# Altium PCB CT_Breakout_Board.PcbDoc
Units mm, origin at the board's own origin, x right, y up, seen from the top; angles counter-clockwise.
Board outline 45.97 x 72.39 mm, 2 copper layers (Top Layer, Bottom Layer); 51 components, 20 nets, 112 pads, 13 vias.
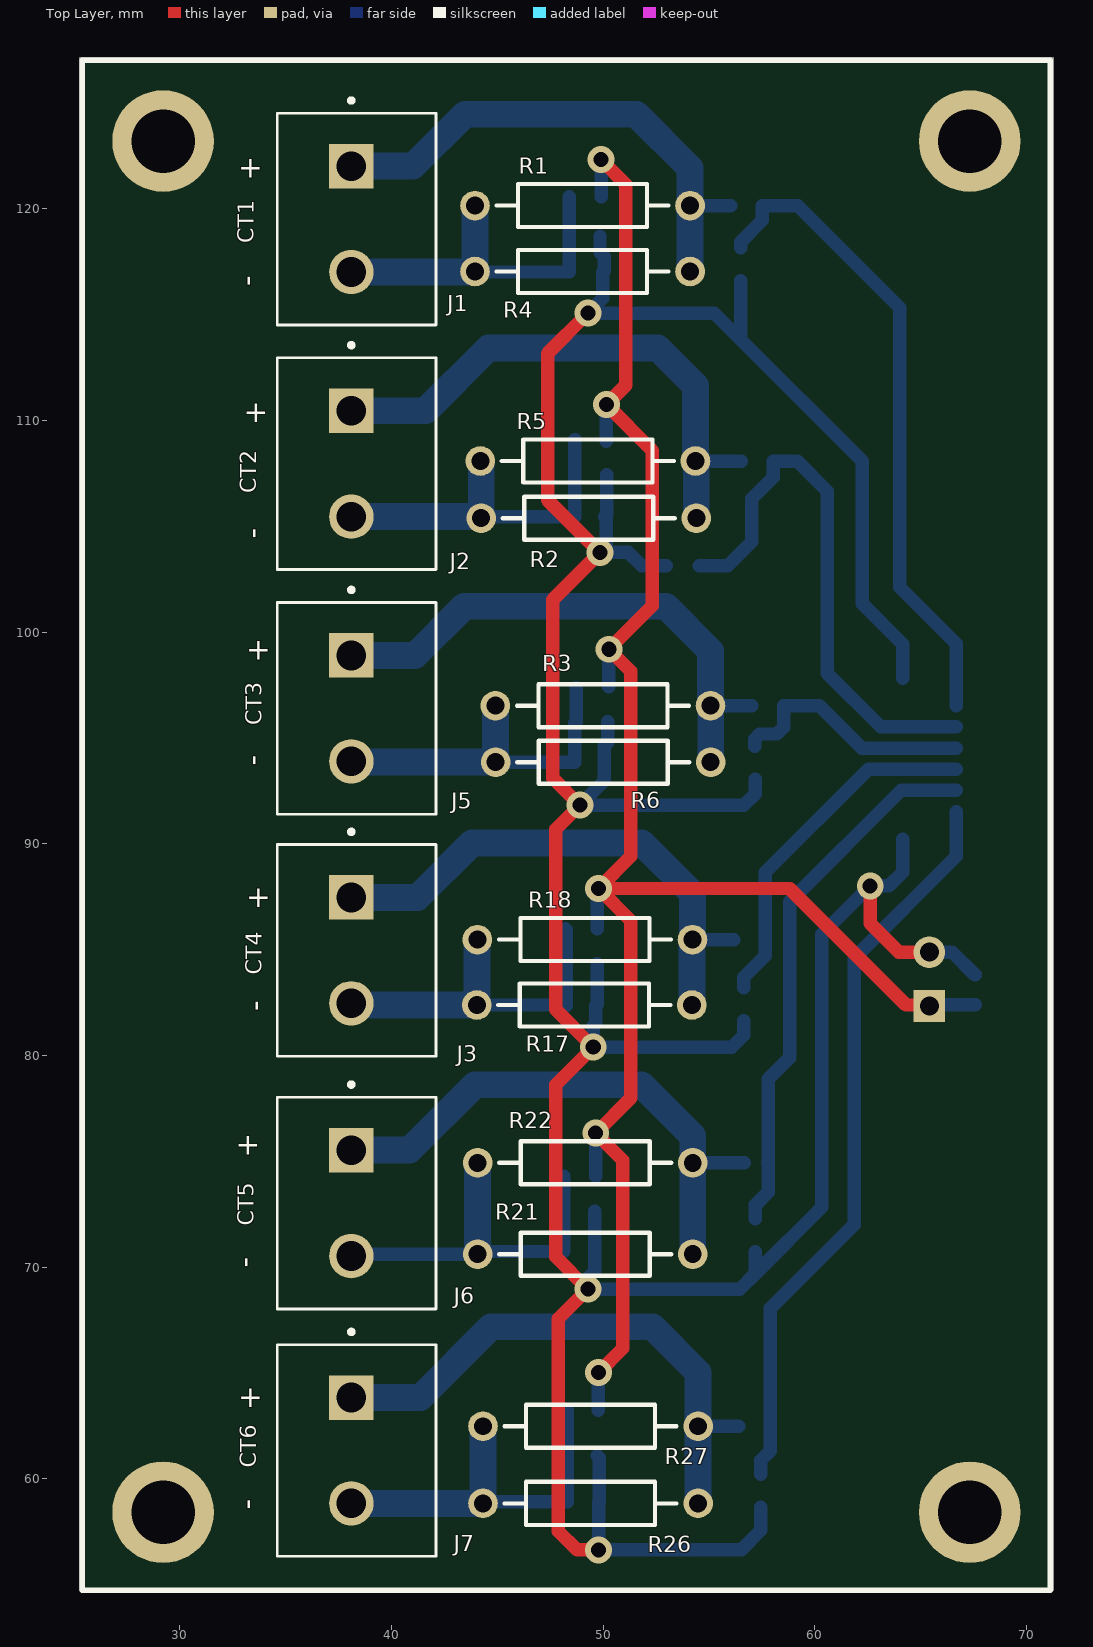
[diagram p0: Top Layer view]
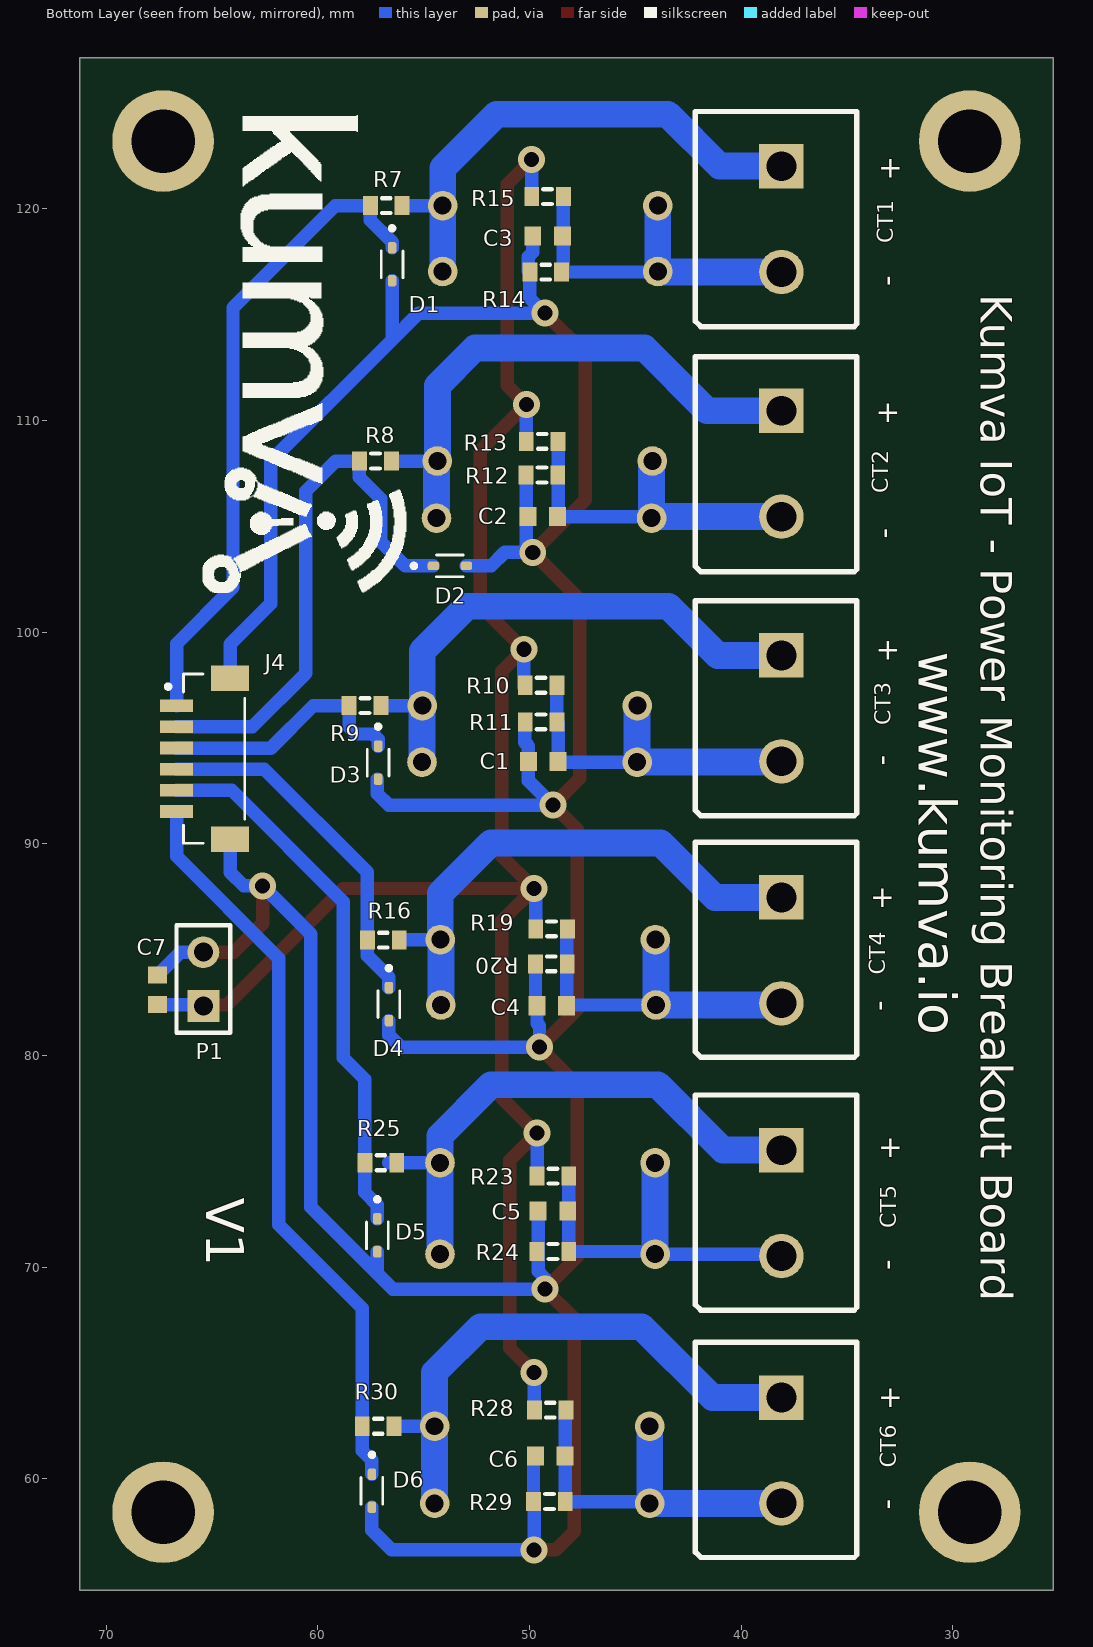
[diagram p1: Bottom Layer view, seen from below]

## Layer stack, top to bottom
Top Solder: solder mask 0.0102, Solder Resist, Dk 3.5
Top Layer: signal copper 0.0356
Dielectric 1: dielectric 0.32, FR-4, Dk 4.8
Bottom Layer: signal copper 0.0356
Bottom Solder: solder mask 0.0102, Solder Resist, Dk 3.5

## Board outline
25.273,54.737 71.247,54.737 71.247,127.127 25.273,127.127

## Design rules (kind name [scope] priority, off if disabled: settings)
Clearance [All] p1: gap=0.254 ignorepadtopadclearanceinfootprint=FALSE except(0: Arc-Hole Track-Hole SMDPad-Hole THPad-Hole Via-Hole Fill-Hole Poly-Hole Region-Hole Text-Hole)
HoleSize [All] p1: absolutevalues=TRUE maxlimit=5 minlimit=0.025 maxpercent=80.000 minpercent=20.000
MinimumSolderMaskSliver [All] p1: minsoldermaskwidth=0.127
PolygonConnect [All] p1: connectstyle=Relief reliefconductorwidth=0.254 reliefentries=4 polygonreliefangle="90 Angle" airgapwidth=0.254
RoutingVias [All] p1: holewidth=0.711 width=1.27 viastyle="Through Hole" minholewidth=0.711 minwidth=1.27 maxholewidth=0.711 maxwidth=1.27
SilkToSilkClearance [All] p1: silktosilkclearance=0.076
SilkToSolderMaskClearance [IsPad] p1: minsilkscreentomaskgap=0.076 clearancetoexposedcopper=TRUE
SolderMaskExpansion [All] p1: expansion=0.102
Width [All] p1: maxlimit=1.524 minlimit=0.254 preferedwidth=0.635 minimp=50.000000 maximp=50.000000 favimp=50.000000
26 further rules are at their usual default settings.

## Components (designator, comment, footprint, x,y, rotation, side; value= is the part's Value field where it differs from the comment)
C1 "Cap Semi" 1608[0603] 49.352,93.893 r180 bottom value=10uF/6V
C2 "Cap Semi" 1608[0603] 49.37,105.45 r180 bottom value=10uF/6V
C3 "Cap Semi" 1608[0603] 49.149,118.699 r180 bottom value=10uF/6V
C4 "Cap Semi" 1608[0603] 48.948,82.346 r180 bottom value=10uF/6V
C5 "Cap Semi" 1608[0603] 48.895,72.644 r180 bottom value=10uF/6V
C6 "Cap Semi" 1608[0603] 49.022,61.087 r180 bottom value=10uF/6V
C7 "Cap Semi" 1608[0603] 67.564,83.101 r270 bottom value=0.1uF
D1 "BZT52C3V3T-7" SODFL1608X65N 56.493,117.372 r270 bottom
D2 "BZT52C3V3T-7" SODFL1608X65N 53.761,103.124 r180 bottom
D3 "BZT52C3V3T-7" SODFL1608X65N 57.15,93.831 r270 bottom
D4 "BZT52C3V3T-7" SODFL1608X65N 56.642,82.423 r270 bottom
D5 "BZT52C3V3T-7" SODFL1608X65N 57.19,71.501 r270 bottom
D6 "BZT52C3V3T-7" SODFL1608X65N 57.444,59.436 r270 bottom
J1 "CON22" HANDSON_KF301-2P 38.1,119.507 r270 top
J2 "CON22" HANDSON_KF301-2P 38.1,107.95 r270 top
J3 "CON22" HANDSON_KF301-2P 38.1,84.963 r270 top
J4 "BM06B-SRSS-TB(LF)(SN)" JST_BM06B-SRSS-TB(LF)(SN) 64.897,94.02 r270 bottom
J5 "CON22" HANDSON_KF301-2P 38.1,96.393 r270 top
J6 "CON22" HANDSON_KF301-2P 38.1,73.025 r270 top
J7 "CON22" HANDSON_KF301-2P 38.1,61.341 r270 top
P1 "Power" HDR1X2 65.405,82.336 r90 bottom
R1 "DNC" AXIAL-0.4 49.022,120.142 r0 top value=22
R2 "DNC" AXIAL-0.4 49.316,105.377 r0 top value=22
R3 "DNC" AXIAL-0.4 49.986,96.52 r0 top value=22
R4 "22" AXIAL-0.4 49.022,117.029 r0 top
R5 "22" AXIAL-0.4 49.276,108.077 r0 top
R6 "22" AXIAL-0.4 49.998,93.853 r0 top
R7 "Res3" J1-0603 56.769,120.142 r0 bottom value=1K
R8 "Res3" J1-0603 57.277,108.077 r0 bottom value=1K
R9 "Res3" J1-0603 57.773,96.52 r0 bottom value=1K
R10 "Res3" J1-0603 49.456,97.485 r0 bottom value=470K
R11 "Res3" J1-0603 49.455,95.758 r180 bottom value=470K
R12 "Res3" J1-0603 49.415,107.419 r180 bottom value=470K
R13 "Res3" J1-0603 49.403,109.006 r0 bottom value=470K
R14 "Res3" J1-0603 49.236,117.001 r180 bottom value=470K
R15 "Res3" J1-0603 49.149,120.569 r0 bottom value=470K
R16 "Res3" J1-0603 56.908,85.449 r0 bottom value=1K
R17 "DNC" AXIAL-0.4 49.109,82.383 r0 top value=22
R18 "22" AXIAL-0.4 49.137,85.471 r0 top
R19 "Res3" J1-0603 48.96,85.979 r0 bottom value=470K
R20 "Res3" J1-0603 48.97,84.328 r180 bottom value=470K
R21 "DNC" AXIAL-0.4 49.149,70.612 r0 top value=22
R22 "22" AXIAL-0.4 49.149,74.93 r0 top
R23 "Res3" J1-0603 48.895,74.295 r0 bottom value=470K
R24 "Res3" J1-0603 48.895,70.739 r180 bottom value=470K
R25 "Res3" J1-0603 57.023,74.93 r0 bottom value=1K
R26 "DNC" AXIAL-0.4 49.403,58.841 r0 top value=22
R27 "22" AXIAL-0.4 49.403,62.484 r0 top
R28 "Res3" J1-0603 49.022,63.246 r0 bottom value=470K
R29 "Res3" J1-0603 49.062,58.928 r180 bottom value=470K
R30 "Res3" J1-0603 57.15,62.484 r0 bottom value=1K

## Footprints (in the part's own frame and the unit in brackets; to place one, negate y for a bottom-side part, rotate by r counter-clockwise, add the part's x,y. Pads: shape width x height; smd on the part's side, far side on the other; paste and mask are expansions set on the pad)
1608[0603] [mm] "Chip Capacitor, Body 1.6x0.8mm, IPC High Density"
  rect 0.8x0.9 smd: 1(-0.7,0) 2(0.7,0)
  body extent -0.87,-0.48 0.87,0.48, height 1.3
AXIAL-0.4 [mm] "Axial Device, Thru-Hole; 2 Leads; 0.4 in Pin Spacing"
  round 1.4 hole 0.85: 1(-5.08,0) 2(5.08,0)
  silkscreen extent -4.06,-1.02 4.06,1.02
HANDSON_KF301-2P [mm]
  rect 2.1x2.1 hole 1.4: 1(-2.5,0)
  round 2.1 hole 1.4: 2(2.5,0)
  silkscreen extent -5.7,-3.5 5,4
HDR1X2 [mm] "Connector; Header; 2 Position"
  rect 1.5x1.5 hole 0.9: 1(0,0)
  round 1.5 hole 0.9: 2(2.54,0)
  silkscreen extent -1.27,-1.27 3.81,1.27
J1-0603 [mm] "Chip Resistor, Body 1.6x0.8mm, IPC High Density"
  rect 0.7x0.9 smd: 1(-0.75,0) 2(0.75,0)
  silkscreen extent -0.2,-0.35 0.2,0.35, body extent -0.85,-0.48 0.85,0.48, height 0.9
JST_BM06B-SRSS-TB(LF)(SN) [mm]
  rect 0.6x1.55 smd: 1(-2.5,-1.775) 2(-1.5,-1.775) 3(-0.5,-1.775) 4(0.5,-1.775) 5(1.5,-1.775) 6(2.5,-1.775)
  rect 1.2x1.8 smd: S1(-3.8,0.75) S2(3.8,0.75)
  silkscreen extent -4,-2.27 4,1.45
SODFL1608X65N [mm]
  rrect50% 0.54x0.4 smd: A(0.78,0) C(-0.78,0)
  silkscreen extent -1.8,-0.52 0.63,0.52

## Part data
C1 C2 C3 C4 C5 C6 C7: "Capacitor (Semiconductor SIM Model)", LatestRevisionDate=29-May-2009, LatestRevisionNote="IPC-7351 Footprint Added.", PackageDescription="Chip Capacitor", PackageReference=C1206, Published=8-Jun-2000, Publisher="Altium Limited"
D1 D2 D3 D4 D5 D6: "Zener Diode 3.3V 300mW A�}6% Surface Mount SOD-523", Package="SOD-523 Diodes Inc.", Availability=Unavailable, MF="Diodes Inc.", MP=BZT52C3V3T-7, Price=None, SnapEDA_Link=https://www.snapeda.com/parts/BZT52C3V3T-7/Diodes%20Inc./view-part/523569/?ref=snap
J1 J2 J3 J5 J6 J7: library part KF301-2P, "2 Pin Terminal Block 5mm Pitch", Package=Package, Availability=Unavailable, MF="Handson Technology", MP=KF301-2P, Price=None, SnapEDA_Link=https://www.snapeda.com/parts/KF301-2P/Handson%20Technology/view-part/4276957/?ref=snap
J4: "Connector Header Surface Mount 6 position 0.039 (1.00mm)", Package=None, Availability=Unavailable, BuyPart=https://www.snapeda.com/parts/BM06B-SRSS-TB(LF)(SN)/JST%20Sales%20America%20Inc./view-part/317877/?ref=eda, MF="JST Sales", MP=BM06B-SRSS-TB(LF)(SN), Price=None, SnapEDA_Link=https://www.snapeda.com/parts/BM06B-SRSS-TB(LF)(SN)/JST%20Sales%20America%20Inc./view-part/317877/?ref=snap
P1: library part "Header 2", "Header, 2-Pin", LatestRevisionDate=17-Jul-2002, LatestRevisionNote="Re-released for DXP Platform.", Publisher="Altium Limited"
R1 R2 R3 R4 R5 R6 R17 R18 R21 R22 R26 R27: library part Res2, "Resistor", LatestRevisionDate=17-Jul-2002, LatestRevisionNote="Re-released for DXP Platform.", PackageDescription="Axial Device, Thru-Hole; 2 Leads; 0.4 in Pin Spacing", PackageReference=AXIAL-0.4, Published=8-Jun-2000, Publisher="Altium Limited"
R7 R8 R9 R10 R11 R12 R13 R14 R15 R16 R19 R20 R23 R24 R25 R28 R29 R30: "Resistor", LatestRevisionDate=29-May-2009, LatestRevisionNote="IPC-7351 Footprint Added.", PackageDescription="Chip Resistor", PackageReference=J1-0603, Published=8-Jun-2000, Publisher="Altium Limited"

## Free pads (board coordinates)
  round 4.8 hole 3 unplated: 2(29.21,58.42) 2(29.21,123.19) 2(67.31,58.42) 2(67.31,123.19)

## Via types
v1: diameter 1.27, hole 0.711, Top Layer to Bottom Layer, 13 vias

## Nets (pads, with @x,y where several pads share a name; then routed paths per layer and width w, separated by ;. In a path a pad name is that pad's centre, name@x,y a point inside that pad or via, vN(x,y) a via of type N, cw(c..) or ccw(c..) an arc to the next point about the centre after c; other vN are vias at no path point)
GND: C1.1 C2.1 C3.1 C4.1 C5.1 C6.1 C7.1 D1.A D2.A D3.A D4.A D5.A D6.A J4.S1 J4.S2 P1.2 R11.1 R12.1 R14.1 R20.1 R24.1 R29.1 | length 190.8
  Top Layer w0.635: v1(49.276,115.062) 47.371,113.157 47.371,106.237 v1(49.849,103.759) 47.625,101.535 47.625,93.091 v1(48.895,91.821) 47.752,90.678 47.752,82.169 v1(49.53,80.391) 47.752,78.613 47.752,70.485 v1(49.276,68.961) 47.879,67.564 47.879,57.531 48.768,56.642 v1(49.784,56.642) ; v1(62.611,88.011) 62.611,86.233 63.968,84.876 P1.2@65.278,84.876
  Bottom Layer w0.635: v1(48.895,91.821) 50.052,92.978 C1.1 50.052,94.615 50.217,94.78 R11.1@50.217,95.758 ; v1@49.403,91.821 56.642,91.821 57.19,92.369 D3.A@57.19,93.051 ; C5.1 49.595,69.8 49.276,69.481 v1(49.276,68.961) 56.453,68.961 57.19,69.698 ; R20.1 49.72,82.418 C4.1 49.648,81.525 49.53,81.407 v1(49.53,80.391) 56.072,80.391 56.642,80.961 D4.A ; C6.1 49.812,60.997 R29.1 49.784,58.9 v1(49.784,56.642) 56.515,56.642 57.444,57.571 D6.A ; C3.1 49.849,117.932 50.052,117.729 50.052,117.067 R14.1 49.986,115.772 v1(49.276,115.062) 55.245,115.062 56.493,113.814 ; R12.1 50.165,105.545 C2.1 50.153,105.367 50.153,104.063 v1(49.849,103.759) 51.181,103.759 51.816,103.124 D2.A ; D1.A 56.493,113.814 ; D5.A 57.19,69.698 ; J4.S2 64.147,88.658 63.5,88.011 v1(62.611,88.011) 60.325,85.725 60.325,72.833 57.19,69.698 ; J4.S1 64.147,99.429 62.23,101.346 62.23,108.077 56.493,113.814 ; P1.2@65.278,84.876 P1.2 66.489,84.876 C7.1
NetC1_2: C1.2 J5.2 R3.1 R6.1 R10.1 R11.2 | length 16.7
  Bottom Layer w0.635: J5.2 J5.2@38.14,93.853 ; R3.1 R3.1@44.918,96.508 ; R6.1 C1.2@48.652,93.853 ; C1.2 48.652,95.693 48.717,95.758 R10.1@48.717,97.358
  Bottom Layer w1.27: J5.2@38.14,93.853 R6.1 R3.1@44.918,96.508
NetC2_2: C2.2 J2.2 R2.1 R5.1 R12.2 R13.1 | length 17
  Bottom Layer w0.635: R2.1@44.163,105.45 R2.1 44.309,105.45 48.653,105.45 48.653,109.076 R13.1@48.67,109.093 ; R5.1 R5.1@44.236,108.037
  Bottom Layer w1.27: J2.2 R2.1@44.163,105.45 ; R2.1 R5.1@44.236,108.037
NetC3_2: C3.2 J1.2 R1.1 R4.1 R14.2 R15.1 | length 16.8
  Bottom Layer w0.635: R4.1@43.793,117.007 48.399,117.007 R15.1
  Bottom Layer w1.27: J1.2 R4.1@43.793,117.007 ; R4.1@43.942,117.156 R1.1
NetC4_2: C4.2 J3.2 R17.1 R18.1 R19.1 R20.2 | length 16.9
  Bottom Layer w0.635: J3.2 J3.2@38.18,82.383 ; R17.1 C4.2@48.248,82.383 ; R18.1@44.029,85.443 R18.1 ; R19.1 48.248,85.941 C4.2@48.248,82.383 ; C4.2 C4.2@48.248,82.383
  Bottom Layer w1.27: J3.2@38.18,82.383 R17.1 R18.1@44.029,85.443
NetC5_2: C5.2 J6.2 R21.1 R22.1 R23.1 R24.2 | length 18.1
  Bottom Layer w0.635: J6.2 38.187,70.612 R21.1 44.196,70.739 R24.2 R23.1 ; R22.1@44.069,74.803 R22.1@44.196,74.93
  Bottom Layer w1.27: R21.1 R22.1@44.069,74.803
NetC6_2: C6.2 J7.2 R26.1 R27.1 R28.1 R29.2 | length 18.2
  Bottom Layer w0.635: R26.1 44.41,58.928 R29.2 48.312,63.206 R28.1
  Bottom Layer w1.27: J7.2 R26.1 R27.1
NetD1_C: D1.C J4.1 R7.2 | length 30.8
  Bottom Layer w0.635: D1.C 56.493,118.423 57.519,119.449 R7.2 59.182,120.142 64.008,115.316 64.008,102.108 66.672,99.444 J4.1
NetD2_C: D2.C J4.2 R8.2 | length 26.1
  Bottom Layer w0.635: D2.C 55.88,103.124 57.023,104.267 57.023,106.299 58.039,107.315 58.039,108.065 R8.2 59.159,108.077 60.579,106.657 60.579,98.044 63.103,95.52 J4.2
NetD3_C: D3.C J4.3 R9.2 | length 11.9
  Bottom Layer w0.635: D3.C 57.15,94.943 57.392,95.185 58.204,95.185 58.523,95.504 R9.2 60.214,96.52 62.214,94.52 J4.3
NetD4_C: D4.C J4.4 R16.2 | length 16.9
  Bottom Layer w0.635: D4.C 56.642,83.693 57.658,84.709 R16.2 57.658,88.646 62.532,93.52 J4.4
NetD5_C: D5.C J4.5 R25.2 | length 25.7
  Bottom Layer w0.635: D5.C 57.19,72.938 57.785,73.533 R25.2@57.785,74.93 ; R25.2 R25.2@57.785,74.93 ; J4.5 64.072,92.52 58.801,87.249 58.801,79.883 57.785,78.867 R25.2@57.785,74.93
NetD6_C: D6.C J4.6 R30.2 | length 35.1
  Bottom Layer w0.635: D6.C 57.444,60.873 57.9,61.329 R30.2 57.9,68.06 61.849,72.009 61.849,84.582 66.672,89.405 J4.6
NetJ1_1: J1.1 R1.2 R4.2 R7.1 | length 24.8
  Bottom Layer w0.635: R1.2 R7.1
  Bottom Layer w1.27: J1.1 41.021,122.007 43.474,124.46 51.562,124.46 54.102,121.92 R1.2 R4.2@54.102,117.156
NetJ2_1: J2.1 R2.2 R5.2 R8.1 | length 26.7
  Bottom Layer w0.635: R5.2@54.396,108.037 R5.2 R8.1
  Bottom Layer w1.27: J2.1 41.616,110.45 44.577,113.411 52.578,113.411 54.356,111.633 R5.2 ; R2.2 R5.2@54.396,108.037
NetJ3_1: J3.1 R16.1 R17.2 R18.2 | length 25.4
  Bottom Layer w0.635: R18.2@54.189,85.443 R18.2 R16.1@56.158,85.471
  Bottom Layer w1.27: J3.1 41.235,87.463 43.815,90.043 51.816,90.043 54.217,87.642 R18.2 ; R17.2 R18.2@54.189,85.443
NetJ5_1: J5.1 R3.2 R6.2 R9.1 | length 26
  Bottom Layer w0.635: R3.2@55.078,96.508 R3.2 R9.1
  Bottom Layer w1.27: J5.1 41.108,98.893 43.434,101.219 52.959,101.219 55.066,99.112 R3.2 ; R6.2 R3.2@55.078,96.508
NetJ6_1: J6.1 R21.2 R22.2 R25.1 | length 26.4
  Bottom Layer w0.635: R22.2 56.654,74.93
  Bottom Layer w1.27: J6.1 40.854,75.525 43.942,78.613 51.816,78.613 54.229,76.2 R22.2 R21.2
NetJ7_1: J7.1 R26.2 R27.2 R30.1 | length 26.8
  Bottom Layer w0.635: R27.2 R30.1
  Bottom Layer w1.27: J7.1 41.362,63.841 44.704,67.183 52.324,67.183 54.483,65.024 R27.2 R26.2
VCC: C7.2 P1.1 R10.2 R13.2 R15.2 R19.2 R23.2 R28.2 | length 94.6
  Top Layer w0.635: v1(49.784,65.024) 50.927,66.167 50.927,75.045 v1(49.645,76.327) 51.308,77.99 51.308,86.36 v1(49.784,87.884) ; v1(49.899,122.313) 51.054,121.158 51.054,111.645 v1(50.153,110.744) 52.324,108.573 52.324,101.243 v1(50.268,99.187) 51.308,98.147 51.308,89.408 v1(49.784,87.884) ; P1.1@65.532,82.383 64.302,82.383 58.801,87.884 v1(49.784,87.884)
  Bottom Layer w0.635: R23.2 v1(49.645,76.327) ; R19.2 49.71,87.81 v1(49.784,87.884) ; R28.2 49.772,65.012 v1(49.784,65.024) ; R15.2 v1(49.899,122.313) ; R13.2 v1(50.153,110.744) ; R10.2@50.268,97.409 v1(50.268,99.187) ; P1.1@65.278,82.336 65.343,82.401 C7.2

## Silkscreen, mask and mechanical layers (free items; w line width, h text height)
Top Overlay:
  lines w0.254: 25.4,54.737 25.4,79.502 25.4,127 71.12,127 71.12,54.737 25.4,54.737
  text "+" at 32.766,121.459 h1.02
  text "CT1" at 33.481,118.364 h0.76 r90
  text "-" at 33.655,116.332 h1.02 r90
  text "+" at 33.02,109.902 h1.02
  text "CT2" at 33.608,106.553 h0.76 r90
  text "-" at 33.909,104.416 h1.02 r90
  text "+" at 33.147,98.679 h1.02
  text "CT3" at 33.862,95.585 h0.76 r90
  text "-" at 33.909,93.68 h1.02 r90
  text "+" at 33.147,86.996 h1.02
  text "CT4" at 33.862,83.814 h0.76 r90
  text "-" at 34.036,82.076 h1.02 r90
  text "+" at 32.639,75.312 h1.02
  text "CT5" at 33.481,71.963 h0.76 r90
  text "-" at 33.528,69.971 h1.02 r90
  text "+" at 32.766,63.374 h1.02
  text "CT6" at 33.608,60.533 h0.76 r90
  text "-" at 33.655,58.541 h1.02 r90
Bottom Overlay:
  drawing of 43 lines, arcs and shapes, not listed
  text "+" at 33.528,121.459 h1.02
  text "CT1" at 32.813,118.364 h0.76 r270
  text "-" at 32.639,116.332 h1.02 r270
  text "Kumva IoT - Power Monitoring Breakout Board" at 28.694,115.951 h1.5 r90
  text "+" at 33.655,109.902 h1.02
  text "CT2" at 33.067,106.553 h0.76 r270
  text "-" at 32.766,104.416 h1.02 r270
  text "www.kumva.io" at 31.615,99.06 h1.8 r90
  text "+" at 33.655,98.679 h1.02
  text "CT3" at 32.94,95.585 h0.76 r270
  text "-" at 32.893,93.68 h1.02 r270
  text "+" at 33.909,86.996 h1.02
  text "CT4" at 33.194,83.814 h0.76 r270
  text "-" at 33.02,82.076 h1.02 r270
  text "+" at 33.528,75.185 h1.02
  text "V1" at 65.27,73.279 h1.8 r90
  text "CT5" at 32.686,71.836 h0.76 r270
  text "-" at 32.639,69.844 h1.02 r270
  text "+" at 33.528,63.374 h1.02
  text "CT6" at 32.686,60.533 h0.76 r270
  text "-" at 32.639,58.541 h1.02 r270
Mechanical 1:
  lines w0.254: 71.12,79.502 71.12,127 59.627,127 36.893,127 25.4,127 25.4,79.502 25.4,54.737 31.75,54.737 54.356,54.737 71.12,54.737 71.12,91.313 71.12,114.935